# Altium PCB ALCT_MEZ_LX150T.PcbDoc (part 5 of 9)
Units mil, origin at the board's own origin, x right, y up, seen from the top; angles counter-clockwise.
Board outline 4101.98 x 5875.01 mil, 12 copper layers (Top Layer, Mid-Layer 1, +3V3, Mid-Layer 2, +1V2, Mid-Layer 4, +2V5, Mid-Layer 5, GND1, Mid-Layer 7, GND2, Bottom Layer), stack 64.7 mil thick; 378 components, 616 nets, 2492 pads, 1686 vias.
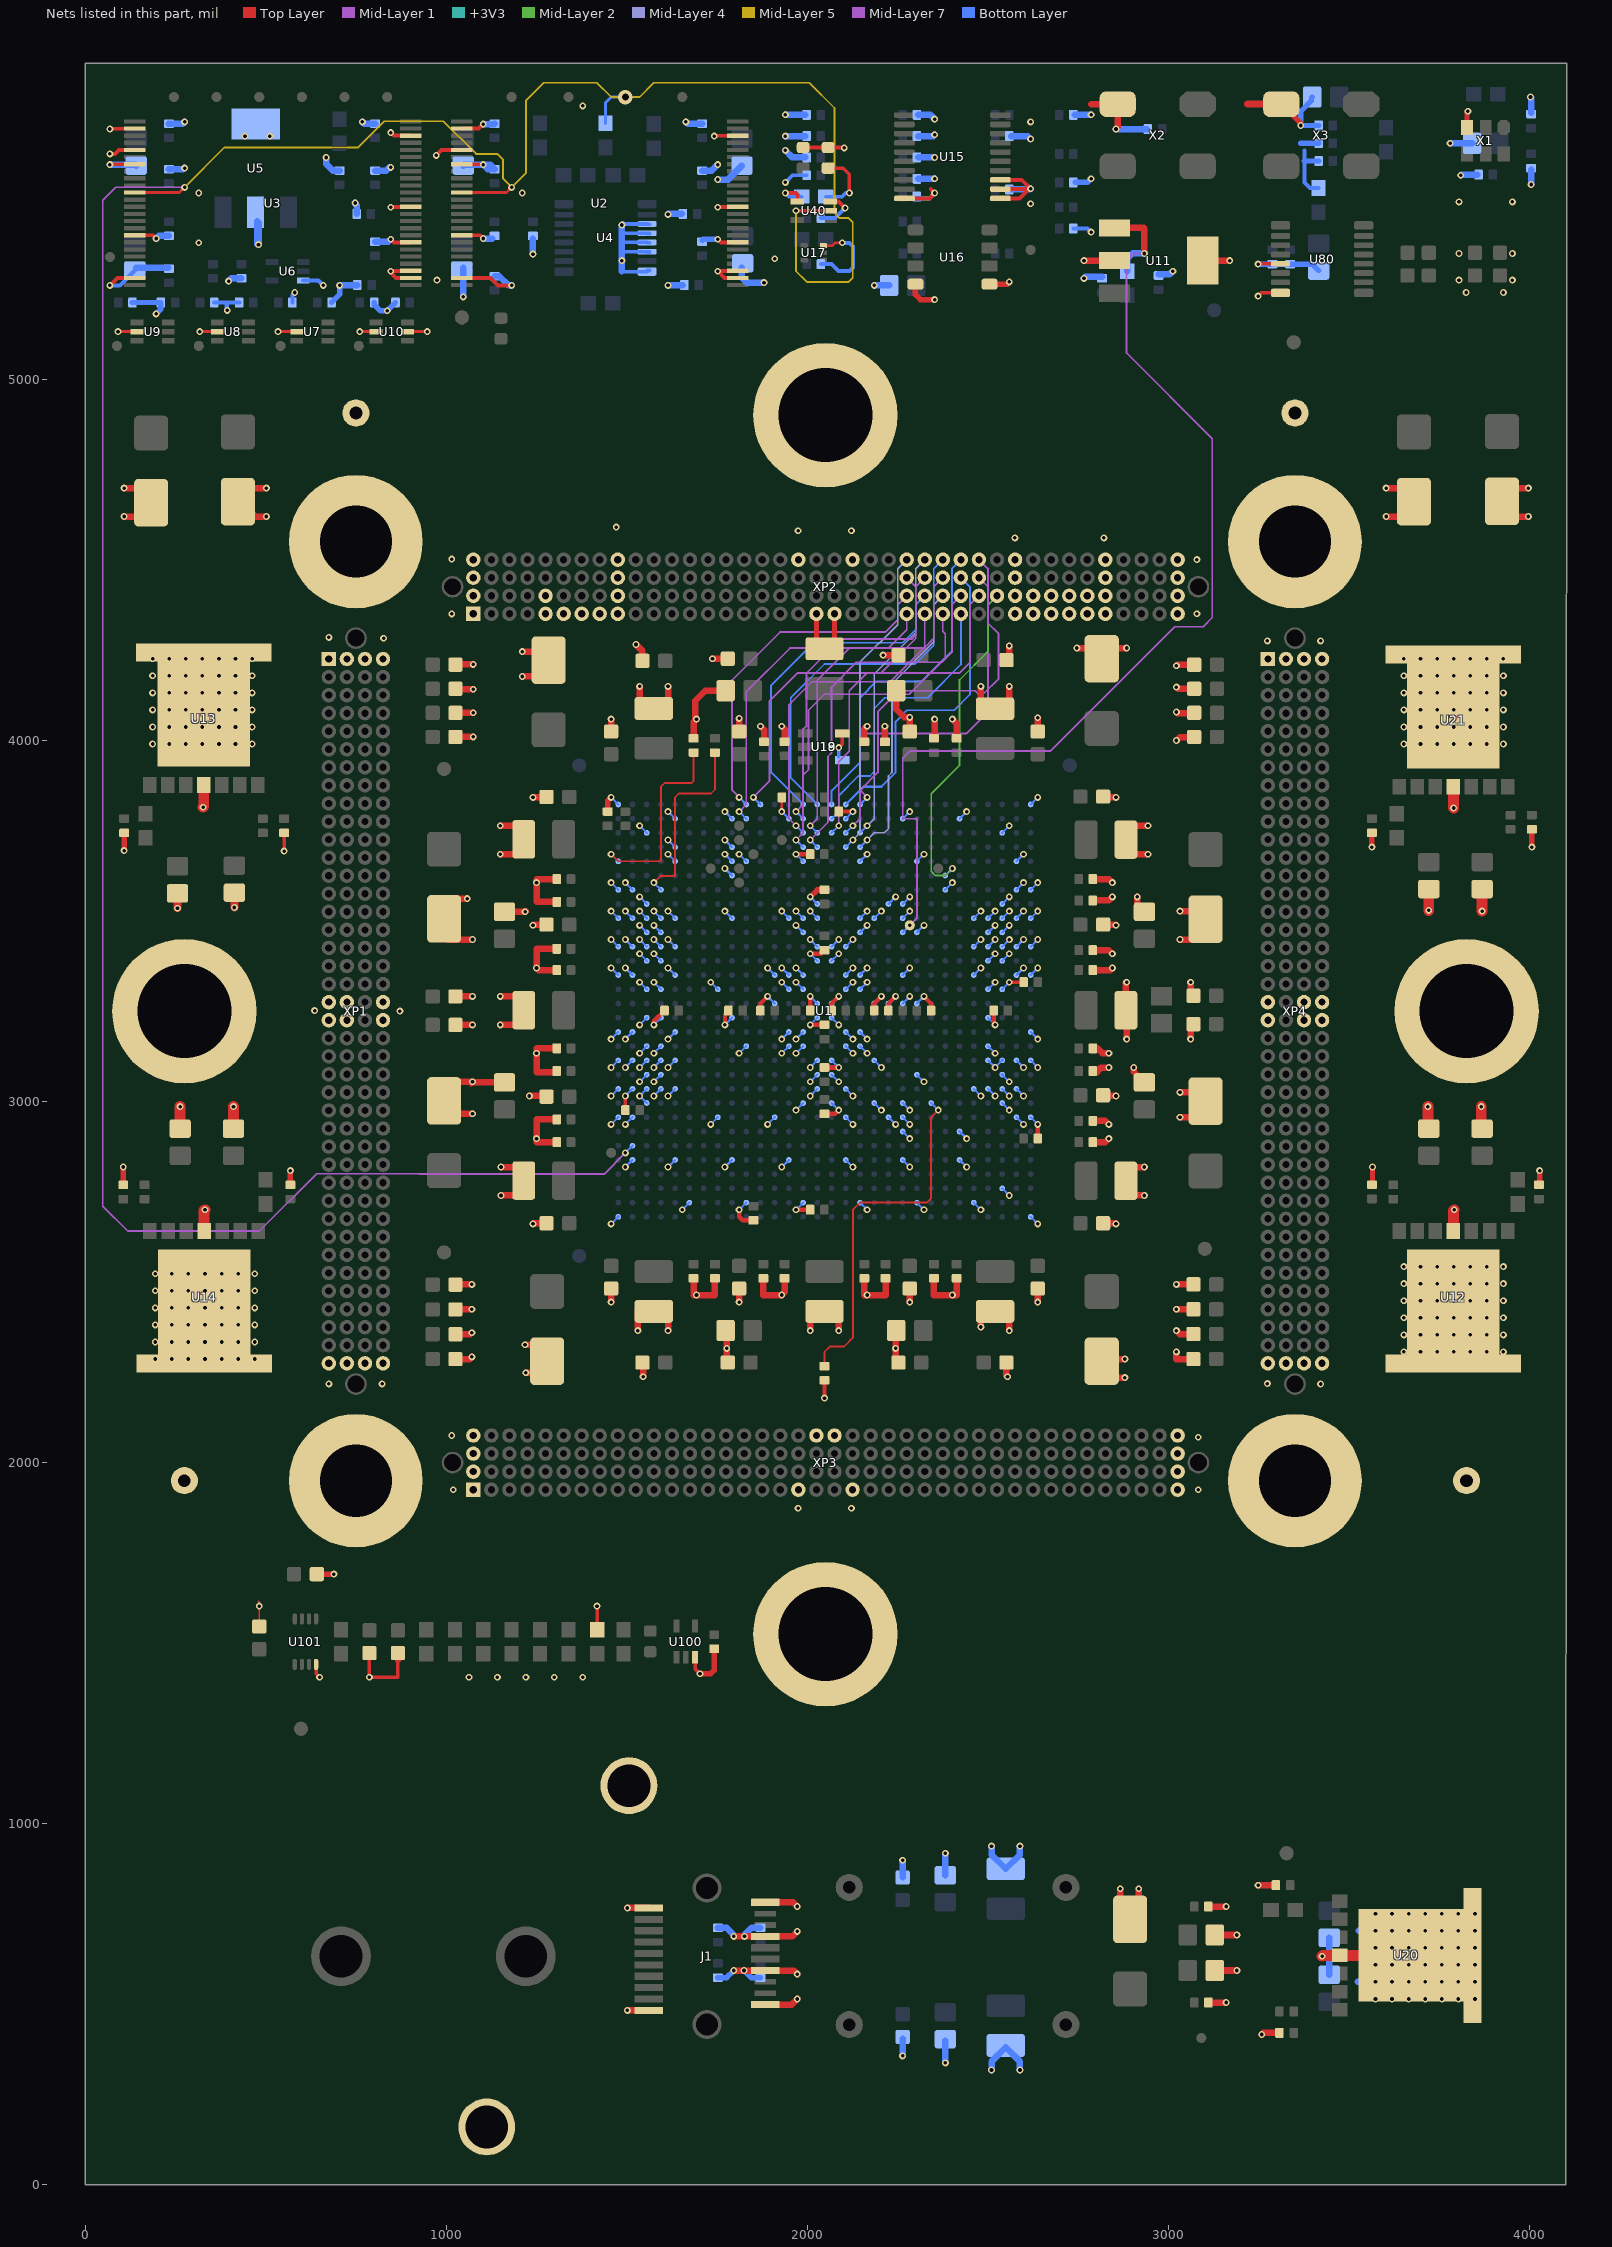
[diagram p14: the nets of this part, all layers, seen from the top]

## Via types
v1: diameter 19, hole 10, Top Layer to Bottom Layer, tented both sides, 1667 vias
v2: diameter 40, hole 20, Top Layer to Bottom Layer, 12 vias
v3: diameter 19, hole 10, Top Layer to Bottom Layer, 7 vias

## Nets (pads, with @x,y where several pads share a name; then routed paths per layer and width w, separated by ;. In a path a pad name is that pad's centre, name@x,y a point inside that pad or via, vN(x,y) a via of type N, cw(c..) or ccw(c..) an arc to the next point about the centre after c; other vN are vias at no path point) (continued)
GND: C1.2 C2.2 C3.2 C4.2 C5.2 C6.2 C7.2 C8.2 C9.2 C10.2 C11.2 C12.2 C13.2 C14.2 C15.2 C16.2 C17.2 C18.2 C19.2 C20.2 C21.2 C22.2 C23.2 C24.2 C25.2 C26.2 C27.2 C28.2 C29.2 C30.2 C31.2 C32.2 C33.2 C40.2 C41.2 C42.2 C43.2 C44.2 C45.2 C46.2 C47.2 C50.2 C51.2 C52.2 C53.2 C54.2 C55.2 C56.2 C57.2 C58.2 C59.2 C60.2 C61.2 C62.2 C63.2 C64.2 C65.2 C66.2 C67.2 C68.2 C69.2 C70.2 C71.2 C72.2 C73.2 C74.2 C75.2 C76.2 C77.2 C78.2 C82.2 C83.2 C84.2 C85.2 C86.2 C87.2 C88.2 C89.2 C90.2 C91.2 C92.2 C93.2 C94.2 C95.2 C96.2 C99.2 C100.2 C101.2 C102.2 C103.2 C104.2 C105.2 C106.2 C107.2 C108.1 C109.2 C110.2 C111.2 C112.2 C113.2 C114.2 C115.2 C116.2 C117.2 C118.2 C119.2 C120.2 C121.2 C122.2 C123.2 C124.2 C125.2 C126.2 C127.2 C128.2 C129.2 C130.2 C131.2 C132.2 C133.2 C134.2 C135.2 C136.2 C137.2 C138.2 C139.2 C140.2 C141.2 C142.2 C143.2 C144.2 C145.2 C146.2 C147.2 C148.2 C201.2 C202.2 C203.2 C204.2 C205.2 C211.2 C212.2 C213.2 C214.2 C215.2 C221.2 C222.2 C223.2 C224.2 C225.2 C231.2 C232.2 C233.2 C234.2 C235.2 C241.2 C242.2 C243.2 C244.2 C251.2 C252.2 C253.2 C254.2 C261.2 C262.2 C263.2 C264.2 C265.2 C266.2 C267.2 C268.2 C271.2 C272.2 C273.2 C274.2 C275.2 C276.2 C301.2 C302.2 C311.2 C312.2 C321.2 C322.2 C331.2 C332.2 C341.2 C342.2 C351.2 C361.2 C362.2 C363.2 C364.2 C365.2 C371.2 C372.2 C373.2 C374.2 C375.2 C401.2 C411.2 C421.2 C431.2 C441.2 C451.2 C461.2 C462.2 C471.2 C472.2 CT1.2 CT2.2 CT3.2 CT4.2 CT5.2 CT6.2 CT7.2 CT8.2 CT9.2 CT10.2 CT11.2 CT12.2 CT13.2 D1.K D41.K H1.1 H2.1 H3.1 H4.1 H12.1 H31.1 H34.1 H42.1 J1.1 J1.10 J1.11 J1.14 J1.17 J1.20 M1.1 M1.2 R3.2 R6.2 R9.2 R12.2 R14.2 R17.2 R22.2 R23.2 R28.2 R48.1 R49.1 R50.2 R52.2 R53.2 R54.2 R57.2 R83.2 R101.1 TPG1.1 TPG2.1 TPG3.1 TPG4.1 U1.A1 U1.A8 U1.A12 U1.A14 U1.A18 U1.A20 U1.A22 U1.A24 U1.A30 U1.AA2 U1.AA13 U1.AA26 U1.AB5 U1.AB15 U1.AB22 U1.AB25 U1.AB26 U1.AB27 U1.AB29 U1.AC8 U1.AC17 U1.AE2 U1.AF5 U1.AF10 U1.AF12 U1.AF14 U1.AF18 U1.AF20 U1.AF22 U1.AF26 U1.AF27 U1.AF29 U1.AG10 U1.AG11 U1.AG12 U1.AG13 U1.AG15 U1.AG17 U1.AG19 U1.AG20 U1.AG21 U1.AG22 U1.AH9 U1.AH10 U1.AH11 U1.AH12 U1.AH13 U1.AH15 U1.AH17 U1.AH19 U1.AH20 U1.AH21 U1.AH22 U1.AH23 U1.AH28 U1.AJ5 U1.AJ8 U1.AJ10 U1.AJ12 U1.AJ14 U1.AJ18 U1.AJ20 U1.AJ22 U1.AJ24 U1.AK1 U1.AK8 U1.AK10 U1.AK12 U1.AK14 U1.AK18 U1.AK20 U1.AK22 U1.AK24 U1.AK30 U1.B8 U1.B10 U1.B12 U1.B18 U1.B20 U1.B22 U1.B24 U1.B26 U1.C3 U1.C9 U1.C10 U1.C11 U1.C12 U1.C17 U1.C19 U1.C20 U1.C21 U1.C22 U1.C23 U1.C28 U1.D10 U1.D12 U1.D13 U1.D15 U1.D17 U1.D19 U1.D20 U1.D21 U1.D22 U1.E2 U1.E10 U1.E18 U1.E20 U1.E22 U1.F5 U1.F7 U1.F29 U1.G24 U1.J2 U1.J11 U1.J16 U1.J21 U1.J26 U1.K5 U1.K7 U1.K8 U1.K9 U1.K16 U1.K18 U1.K22 U1.K23 U1.K29 U1.L8 U1.L16 U1.L23 U1.M9 U1.M12 U1.M16 U1.M22 U1.N2 U1.N13 U1.N14 U1.N17 U1.N18 U1.N21 U1.N22 U1.N26 U1.P5 U1.P8 U1.P10 U1.P13 U1.P14 U1.P17 U1.P18 U1.P20 U1.P29 U1.R9 U1.R11 U1.R12 U1.R15 U1.R16 U1.R19 U1.R20 U1.T10 U1.T11 U1.T12 U1.T15 U1.T16 U1.T19 U1.T20 U1.T22 U1.T23 U1.U2 U1.U9 U1.U13 U1.U14 U1.U17 U1.U18 U1.U21 U1.U22 U1.U26 U1.V5 U1.V13 U1.V14 U1.V17 U1.V18 U1.V22 U1.V29 U1.W8 U1.W16 U1.W18 U2.2 U2.5 U2.7 U2.17 U2.23 U2.26 U2.27 U2.31 U2.36 U2.46 U3.2 U3.5 U3.7 U3.17 U3.23 U3.26 U3.27 U3.31 U3.36 U3.46 U4.3 U4.4 U4.5 U4.6 U4.8 U5.1 U5.4 U6.3 U7.2 U8.2 U9.2 U10.2 U10.5 U11.1 U11.4 U12.4 U12.8 U13.4 U13.8 U14.4 U14.8 U15.10 U15.11 U15.12 U15.13 U16.4 U16.5 U17.3 U18.5 U19.5 U20.4 U20.8 U21.4 U21.8 U40.3 U80.5 U80.8 U100.3 U101.4 X1.3 X2.2 X3.2 XP1.A1 XP1.A20 XP1.A21 XP1.A40 XP1.B1 XP1.B20 XP1.B21 XP1.B40 XP1.C1 XP1.C40 XP1.D1 XP1.D20 XP1.D21 XP1.D40 XP2.A1 XP2.A5 XP2.A6 XP2.A7 XP2.A8 XP2.A9 XP2.A20 XP2.A21 XP2.A31 XP2.A32 XP2.A33 XP2.A34 XP2.A35 XP2.A36 XP2.A40 XP2.B1 XP2.B5 XP2.B9 XP2.B31 XP2.B32 XP2.B33 XP2.B34 XP2.B35 XP2.B36 XP2.B40 XP2.C1 XP2.C9 XP2.C31 XP2.C36 XP2.C40 XP2.D1 XP2.D9 XP2.D19 XP2.D22 XP2.D31 XP2.D36 XP2.D40 XP3.A1 XP3.A19 XP3.A22 XP3.A40 XP3.B1 XP3.B40 XP3.C1 XP3.C40 XP3.D1 XP3.D20 XP3.D21 XP3.D40 XP4.A1 XP4.A20 XP4.A21 XP4.A40 XP4.B1 XP4.B40 XP4.C1 XP4.C20 XP4.C21 XP4.C40 XP4.D1 XP4.D20 XP4.D21 XP4.D40 | length 27376.2
  Top Layer w5: 479.77,1616.2 482.28,1613.69 C117.2@482.28,1546.27
  Top Layer w7: v1@842.52,5298.63 v1@843.7,5299.81 ; U17.3@2044.29,5369.49 2068.9,5369.49 2076.77,5377.37
  Top Layer w8: v1(91.21,5131.3) U9.2@143.7,5131.3 U9.2@146.33,5131.3 ; v1(317.59,5131.3) U8.2@366.14,5131.3 U8.2@372.7,5131.3 ; v1(534.12,5131.3) U7.2@585.96,5131.3 U7.2@589.24,5131.3 ; v1(760.5,5131.3) U10.2@805.77,5131.3 U10.2@815.62,5131.3 ; U10.5@902.23,5131.3 v1(947.51,5131.3) ; v1(1929.15,3802.54) R14.2@1929.13,3841.93 ; 2076.77,5377.37 v1(2096.46,5377.37) ; v1@3826.38,5739.18 v1(3828.74,5741.54)
  Top Layer w10: v1(68.9,5623.43) v1@70.48,5623.43 ; v1(68.9,5692.33) 70.08,5693.51 U3.2@137.8,5693.51 ; v1@70.08,5595.08 U3.7@137.8,5595.08 ; v1(551.18,3693.12) R6.2@551.18,3736.42 ; U101.4@639.76,1441.15 639.76,1415.56 v1(649.61,1405.71) ; C107.2@787.4,1462.64 v1(787.4,1405.56) 866.14,1405.56 866.14,1452.01 C108.1@866.14,1462.64 ; U2.7@1043.31,5595.08 1097.24,5595.08 1098.41,5593.91 v1(1102.36,5593.9) ; R101.1@1418.11,1537.6 v1@1418.11,1602.56 ; C261.2@1496.08,2975.81 v1(1496.08,3015.15) ; U100.3@1688.98,1460.83 1688.98,1429.34 v1(1702.76,1415.56) ; v1(1742.13,5672.64) 1743.31,5673.82 U2.46@1807.09,5673.82 ; D1.K@1988.19,5641.15 D41.K@2057.09,5641.15 2101.03,5641.15 v3(2101.88,5640.3) ; v1(2047.24,2178.55) R54.2@2047.24,2223.82 ; v1(2086.61,3979.73) 2096.46,3989.57 U18.5@2096.46,4019.1 ; v1(2559.06,3330.12) C96.2@2594.49,3330.12 ; CT7.2@2866.14,760.6 2890.47,736.27 CT7.2@2917.32,763.12 ; v1(3248.03,5229.73) 3256.89,5238.59 U80.8@3310.04,5238.59 ; v1(3248.03,5318.31) 3249.02,5319.3 U80.5@3310.04,5319.3
  Top Layer w11: v1(68.9,5259.26) 89.76,5280.12 U3.23@137.8,5280.12 ; v1@70.48,5623.43 83.46,5623.43 94.49,5634.45 U3.5@137.8,5634.45 ; U3.17@137.8,5398.23 187.8,5398.23 v1(196.85,5389.18) ; v1@842.52,5298.63 861.02,5280.12 U3.26@901.57,5280.12 ; v1@843.7,5299.81 U3.27@901.57,5299.81 ; v1(846.46,5387.21) 855.12,5378.55 U3.31@901.57,5378.55 ; v1(846.46,5475.79) 847.64,5476.97 U3.36@901.57,5476.97 ; v1(846.46,5682.49) 855.12,5673.82 U3.46@901.57,5673.82 ; v1(972.44,5619.49) 987.4,5634.45 U2.5@1043.31,5634.45 ; U2.23@1043.31,5280.12 1122.05,5280.12 1142.91,5259.26 v1(1181.1,5259.26) ; U2.17@1043.31,5398.23 1093.31,5398.23 v1(1102.36,5389.18) ; U2.2@1043.31,5693.51 1089.77,5693.51 v1(1102.36,5706.1) ; v1@1748.03,5475.79 1749.21,5476.97 U2.36@1807.09,5476.97 ; v1(1751.97,5387.21) 1760.63,5378.55 U2.31@1807.09,5378.55 ; U2.26@1807.09,5280.12 1807.09,5280.24 1770.36,5280.24 v1(1751.97,5298.63) 1771.65,5298.63 1772.83,5299.81 U2.27@1807.09,5299.81 ; U40.3@2062.99,5491.54 2086.61,5491.54 v1(2104.33,5473.82) ; U15.10@2268.7,5500.4 2337.6,5500.4 v1(2352.36,5515.16) ; 2341.54,5525.99 v1@2346.71,5520.81 ; v1@2346.46,5521.07 v1@2346.71,5520.81 ; U15.11@2534.45,5500.4 2587.6,5500.4 v1@2613.19,5525.99 ; U15.12@2534.45,5525.99 v1@2613.19,5525.99 ; U15.13@2534.45,5551.58 2593.5,5551.58 2616.14,5528.94 v1@2613.19,5525.99 ; v1@2346.71,5520.81 v1(2352.36,5515.16) ; v1@2346.71,5520.81 v1(2352.36,5515.16)
  Top Layer w12: v1(1574.8,3212.01) 1574.8,3221.86 C202.2@1604.33,3251.38 ; v1(1771.66,3212) 1771.66,3241.55 C221.2@1781.5,3251.38 ; v1(1811.03,2700.2) 1811.02,2680.52 1820.87,2670.67 C232.2@1850.39,2670.67 ; C265.2@1870.08,3251.38 1870.08,3271.05 v1(1889.78,3290.75) ; v1(1968.51,2700.2) C242.2@2007.87,2700.2 ; v1(1968.51,3684.45) C211.2@2007.87,3684.45 ; v1(2007.88,3212) C273.2@2047.24,3212.01 ; C272.2@2007.87,3251.38 v1(2007.88,3290.75) ; v1(2007.88,3408.84) 2037.38,3408.84 C263.2@2047.24,3418.71 ; C262.2@2047.24,2965.95 2076.8,2965.95 v1(2086.63,2975.78) ; C271.2@2066.93,3251.38 2066.93,3271.05 v1(2086.63,3290.75) ; C222.2@2086.61,3802.56 v1@2125.96,3802.56 ; C274.2@2185.04,3251.38 2185.04,3271.06 v1(2204.73,3290.75) ; C212.2@2224.41,3251.38 2224.41,3271.07 v1(2244.09,3290.75) ; v1(2322.84,3290.75) 2342.52,3271.08 C267.2@2342.52,3251.38 ; C94.2@2515.75,3251.38 2515.75,3215.95 v1(2519.69,3212) ; C252.2@2637.8,2897.05 v1(2637.79,2936.42)
  Top Layer w14: XP2.A20@2025,4350.01 2025,4275.6 C462.2@2047.24,4253.35 2075,4281.11 XP2.A21@2075,4350.01
  Top Layer w15: R9.2@105.76,2775.01 v1(105.76,2818.31) ; v1(108.27,3694.3) C8.2@108.27,3739.57 ; C13.2@568.36,2773.04 v1(568.36,2808.47) ; C118.2@641.73,1691.15 v1(688.98,1691.15) ; 866.14,1452.01 C108.1@878.74,1464.61 ; C10.2@1025.59,2296.66 C10.2@1029.53,2292.72 ; R57.2@1446.85,3802.56 1446.85,3832.06 v1(1456.71,3841.92) ; v1(1702.76,1415.56) 1732.28,1415.56 1742.13,1425.4 C109.2@1742.13,1484.45 ; v1(2007.88,3566.33) 2027.57,3586.03 C223.2@2047.24,3586.03 ; C264.2@2047.24,3093.9 v1(2086.63,3093.9) ; U16.4@2299.07,5263 2299.07,5233.8 2312.99,5219.89 v1(2352.36,5219.89) ; U16.5@2504.07,5263 2552.95,5263 v1(2559.06,5269.1) ; X3.2@3321.85,5751.38 3366.14,5707.09 v1(3366.14,5702.17) ; v1(3562.99,3704.14) C16.2@3562.99,3739.57 ; R17.2@3564.57,2775.01 v1(3564.57,2818.31) ; X1.3@3826.38,5696.27 v1@3826.38,5739.18 ; v1(4005.91,3704.14) R12.2@4005.91,3747.45 ; C19.2@4027.17,2773.04 v1(4027.17,2808.47)
  Top Layer w18: v1(108.27,4619.49) 143.7,4619.49 185.04,4660.83 147.64,4698.23 v1(108.27,4698.23) ; v1(501.97,4619.49) 471.26,4619.49 429.13,4661.62 465.75,4698.23 v1(501.97,4698.23) ; C10.2@1023.62,2291.93 C10.2@1024.41,2292.72 ; C125.2@1023.62,2425.79 1024.8,2424.61 C125.2@1025.59,2424.61 ; C122.2@1023.62,2492.72 1024.41,2493.51 v1(1070.87,2493.51) ; C10.2@1025.59,2286.82 1064.96,2286.82 v1(1070.87,2292.72) ; C129.2@1025.59,2355.45 1066.67,2355.45 v1(1070.87,2359.65) ; C125.2@1025.59,2424.09 1070.34,2424.09 v1(1070.87,2424.61) ; C124.2@1031.5,3212.8 1032.28,3212.01 v1(1072.83,3212.01) ; C121.2@1031.5,3283.67 1038.58,3290.75 v1(1072.83,3290.75) ; C139.2@1031.5,4008.47 1032.28,4009.26 v1(1074.8,4009.26) ; C143.2@1031.5,4075.4 1032.28,4076.19 v1(1074.8,4076.19) ; C123.2@1031.5,4142.33 1032.68,4141.15 v1(1074.8,4141.15) ; C142.2@1031.5,4209.26 1032.28,4210.05 v1(1074.8,4210.05) ; v1(1058.07,3561.42) 994.09,3561.42 CT5.2@994.09,3505.32 994.09,3458.08 1003.94,3448.23 v1(1072.83,3448.23) ; v1@1069.3,3051 1070.87,3052.56 C312.2@1161.42,3052.56 ; v1(1072.83,2965.95) 1029.53,2965.95 CT3.2@994.09,3001.38 994.09,3054.53 v1(1072.83,3054.53) ; v1(1149.61,3212.01) 1214.57,3212.01 C421.2@1214.57,3252.56 1214.57,3290.75 v1(1149.61,3290.75) ; v1(1149.61,3684.45) 1212.6,3684.45 1212.6,3763.19 v1(1149.61,3763.19) ; v1(1151.57,2739.57) 1212.6,2739.57 C461.2@1212.6,2780.91 ; v1(1151.57,2818.31) 1212.6,2818.31 C461.2@1212.6,2780.91 ; C302.2@1161.42,3525.01 v1(1218.5,3525.01) v1@1220.47,3526.97 ; v1(1210.63,4176.58) 1238.19,4176.58 1281.1,4219.49 CT11.2@1283.46,4221.86 1250,4255.32 1240.16,4245.48 v1(1210.63,4245.48) ; C461.2@1213.19,2781.5 C461.2@1212.6,2780.91 ; C471.2@1213.19,3726.38 1214.57,3725.01 C471.2@1213.98,3724.41 ; v1@1218.5,2326.19 1245.28,2326.19 1283.46,2288 1244.27,2248.8 v1(1220.47,2248.8) ; v1(1230.32,3015.16) 1272.83,3015.16 C362.2@1275.59,3012.41 ; v1(1240.16,2660.83) 1241.34,2662.01 C363.2@1279.53,2662.01 ; v1(1240.16,3487.6) 1241.34,3488.79 C374.2@1279.53,3488.79 ; v1(1240.16,3841.93) 1276.38,3841.93 C373.2@1277.56,3843.12 ; C266.2@1306.12,2887.21 1250,2887.21 v1(1250,2897.05) 1250,2950.2 C234.2@1306.12,2950.2 ; C225.2@1306.12,3080.12 1250,3080.12 v1(1250,3133.27) 1250,3147.05 C201.2@1306.12,3147.05 ; C275.2@1306.12,3363.59 1255.91,3363.59 v1(1250,3369.49) 1250,3422.64 C276.2@1306.12,3422.64 ; C243.2@1306.12,3552.56 1250,3552.56 v1(1250,3605.71) 1250,3615.56 C213.2@1306.12,3615.56 ; v1(1456.69,2444.3) C331.2@1456.69,2483.88 ; C311.2@1456.69,4024.22 v1(1456.69,4058.47) ; v1(1501.57,483.47) J1.10@1560.63,483.47 ; v1(1501.57,766.93) J1.1@1560.63,766.93 ; v1(1525.59,4265.16) 1543.31,4247.45 C2.2@1543.31,4219.89 C2.2@1535.43,4227.76 ; v1(1530.51,2365.56) 1530.51,2418.71 C431.2@1574.8,2418.71 1614.17,2418.71 v1(1614.17,2365.56) ; v1(1535.43,4149.02) 1535.43,4088 C411.2@1574.8,4088 1614.17,4088 v1(1614.17,4149.02) ; C126.2@1543.31,2276.97 1545.28,2276.97 v1(1545.28,2237.6) ; C233.2@1685.04,2510.26 1685.04,2463.98 v1(1692.91,2463.98) 1744.09,2463.98 C268.2@1744.09,2510.26 ; R50.2@1685.04,4011.23 1685.04,4050.6 v1(1692.91,4058.47) ; v1@1689.38,4062.01 1689.38,4109.07 1717.52,4137.21 C365.2@1773.62,4137.21 ; v1(1737.2,4225.79) C120.2@1779.53,4225.79 ; C322.2@1773.62,2365.56 1776.57,2362.6 v1(1776.57,2316.34) 1776.57,2279.93 C127.2@1779.53,2276.97 ; v1(1796.26,593.71) v1(1824.41,593.71) J1.14@1883.46,593.71 1962.2,593.71 v1(1972.05,583.86) ; v1(1796.26,688.19) J1.17@1883.46,688.19 1958.27,688.19 v1(1972.05,701.97) ; v1(1811.02,2444.3) C361.2@1811.02,2481.76 C361.2@1811.02,2483.88 ; C321.2@1811.02,4024.22 v1(1811.02,4060.44) ; v1(1870.08,4038.79) 1879.92,4028.94 C205.2@1879.92,3995.72 ; C224.2@1877.95,2510.26 1877.95,2463.98 v1(1929.13,2463.98) 1937.01,2471.86 C231.2@1937.01,2510.26 ; J1.11@1883.46,499.22 1956.3,499.22 v1(1972.05,514.97) ; J1.20@1883.46,782.68 1960.24,782.68 v1(1972.05,770.87) ; v1(1929.13,4038.79) 1936.84,4031.08 C30.2@1936.84,3995.93 ; v1(2007.87,2365.56) 2007.87,2417.92 2086.61,2417.92 v1(2086.61,2365.56) ; C203.2@2157.48,2510.26 2157.48,2463.98 v1(2165.35,2463.98) 2216.54,2463.98 C204.2@2216.54,2510.26 ; C251.2@2157.48,3995.72 2157.48,4030.91 v1(2165.35,4038.79) ; v1(2209.65,4235.64) C140.2@2251.97,4235.64 C140.2@2253.94,4235.64 ; C215.2@2214.57,3995.72 v1(2214.57,4038.79) ; C332.2@2246.06,2365.56 2244.09,2363.59 v1(2244.09,2316.34) 2244.09,2284.85 C135.2@2251.97,2276.97 ; C375.2@2246.06,4137.21 2246.06,4086.03 2268.7,4063.39 v1(2283.46,4063.39) C371.2@2283.46,4024.22 ; v1(2283.46,2444.3) C372.2@2283.46,2481.76 C372.2@2283.46,2483.88 ; C254.2@2350.39,2510.26 2350.39,2463.98 v1(2401.57,2463.98) 2413.39,2463.98 C241.2@2413.39,2510.26 ; R52.2@2350.39,4011.23 2352.36,4013.19 v1(2352.36,4058.47) ; v1(2401.57,4058.47) 2413.39,4046.66 R53.2@2413.39,4011.23 ; v1(2480.32,2375.4) 2480.32,2417.92 2559.06,2417.92 v1(2559.06,2365.56) ; v1(2480.31,4149.02) 2480.31,4090.18 2559.06,4090.18 v1(2559.06,4149.02) ; C128.2@2551.18,2276.97 2551.18,2240.56 v1(2554.13,2237.6) ; C1.2@2551.18,4221.86 2559.06,4229.73 v1(2559.06,4261.23) ; v1(2637.8,2444.3) C341.2@2637.8,2483.88 ; C351.2@2637.8,4024.22 v1(2637.8,4062.41) ; v1(2746.06,4255.32) 2785.43,4255.32 CT4.2@2814.96,4225.79 2844.49,4255.32 v1(2883.86,4255.32) ; v1(2765.75,5328.16) U11.4@2850.39,5328.16 ; 2785.43,5761.23 X2.2@2859.25,5761.23 2859.25,5697.25 v1(2854.33,5692.33) ; C235.2@2790.34,2887.21 2824.8,2887.21 v1(2834.65,2897.05) ; C253.2@2790.34,2946.27 2824.8,2946.27 v1(2834.65,2936.42) ; C92.2@2790.34,3363.59 2838.58,3363.59 v1(2844.49,3369.49) ; C93.2@2790.34,3418.71 2834.65,3418.71 v1(2844.49,3408.86) ; C244.2@2790.34,3556.5 2834.65,3556.5 v1(2844.49,3566.34) ; C214.2@2790.34,3615.56 2834.65,3615.56 v1(2844.49,3605.71) ; C91.2@2799.21,3147.05 2803.15,3147.05 2816.93,3133.27 v1(2834.65,3133.27) ; 2803.15,3080.12 2799.21,3080.12 2812.99,3093.9 v1(2834.65,3093.9) ; CT10.2@2814.96,2280.91 2860.73,2235.14 v1(2878.94,2235.14) ; C301.2@2815.93,2662.01 2853.15,2662.01 v1(2854.33,2660.83) ; C88.2@2815.93,3016.34 2853.15,3016.34 v1(2854.33,3015.16) ; C89.2@2815.93,3488.79 2853.15,3488.79 v1(2854.33,3487.6) ; C364.2@2815.93,3843.12 2817.11,3841.93 v1(2854.33,3841.93) ; CT10.2@2829.53,2286.82 v1(2878.94,2286.82) ; CT7.2@2866.14,760.6 v1(2866.14,820.08) ; v1(2883.86,3172.64) 2883.86,3250.6 C87.2@2881.89,3252.56 2881.89,3328.16 v1(2883.86,3330.12) ; v1(2903.54,3093.9) 2903.54,3082.09 C342.2@2933.07,3052.56 ; v1(2913.39,3566.34) 2913.39,3544.69 C90.2@2933.07,3525.01 ; CT7.2@2917.32,763.12 v1(2917.32,820.08) ; v1(2933.07,2739.57) 2881.89,2739.57 C401.2@2881.89,2780.12 2881.89,2818.31 v1(2933.07,2818.31) ; v1(2942.91,3684.45) 2881.89,3684.45 C86.2@2881.89,3725.01 2881.89,3763.19 v1(2942.91,3763.19) ; v1(3021.65,3999.41) 3030.71,4008.47 C141.2@3070.87,4008.47 ; v1(3021.65,2306.5) 3021.65,2286.82 C9.2@3068.9,2286.82 ; v1(3021.65,2365.56) 3031.5,2355.71 C131.2@3068.9,2355.71 ; v1(3021.65,2424.61) C138.2@3068.9,2424.61 ; v1(3021.65,2493.51) C130.2@3068.9,2493.51 ; v1(3021.65,4078.16) 3024.41,4075.4 C132.2@3070.87,4075.4 ; v1(3021.65,4147.05) 3026.38,4142.33 C136.2@3070.87,4142.33 ; v1(3021.65,4206.11) 3024.8,4209.26 C144.2@3070.87,4209.26 ; v1(3031.5,2956.11) 3057.87,2956.11 CT6.2@3102.36,3000.6 3077.95,3025.01 v1(3031.5,3025.01) ; v1(3031.5,3448.23) 3102.36,3448.23 CT13.2@3102.36,3504.53 3079.92,3526.97 v1(3031.5,3526.97) ; v1(3061.02,3172.64) 3061.02,3206.11 C137.2@3068.9,3213.98 ; v1(3061.02,3330.12) 3061.02,3300.6 C134.2@3068.9,3292.72 ; U11.1@3094.49,5328.16 v1(3169.29,5328.16) ; C111.2@3114.17,505.12 v1(3159.45,505.12) ; C101.2@3114.17,770.87 v1(3159.45,770.87) ; v1(3248.03,829.93) C5.2@3297.24,829.93 ; v1(3257.87,416.54) 3262.6,421.27 R3.2@3301.18,421.27 ; v1(3602.36,4619.49) 3638.98,4619.49 3677.17,4657.68 3636.61,4698.23 v1(3602.36,4698.23) ; v1(3996.06,4619.49) 3958.66,4619.49 3917.32,4660.83 3954.72,4698.23 v1(3996.06,4698.23)
  Top Layer w19: C110.2@3127.95,593.71 v1(3188.98,593.71) ; C100.2@3127.95,692.13 v1(3188.98,692.13)
  Top Layer w19.68: 3218.5,5761.23 X3.2@3312.01,5761.23
  Top Layer w22: v1(255.91,3534.85) C6.2@255.91,3576.19 ; v1(413.39,3536.82) C7.2@413.39,3578.16
  Top Layer w30: C12.2@263.24,2924.61 v1(263.24,2985.64) ; v1(326.77,3814.38) 328.74,3816.34 U13.4@328.74,3876.19 ; U14.4@329.77,2641.15 329.77,2697.84 v1(332.14,2700.2) ; C11.2@410.88,2924.61 v1(410.88,2985.64) ; v1(3425.2,633.08) 3427.56,635.44 U20.4@3474.41,635.44 ; U20.8@3572.83,635.44 U20.4@3474.41,635.44 ; U20.8@3618.77,635.44 U20.4@3474.41,635.44 ; U20.8@3664.7,635.44 U20.4@3474.41,635.44 ; U20.8@3711.81,635.44 U20.4@3474.41,635.44 ; C18.2@3717.96,2924.61 v1(3717.96,2985.64) ; v1(3720.47,3528.94) C14.2@3720.47,3588 C14.2@3720.47,3589.97 ; U12.4@3788.58,2641.15 3788.58,2697.84 v1(3790.95,2700.2) ; U21.4@3788.58,3871.46 3788.58,3813.19 v1(3789.37,3812.41) ; C17.2@3865.6,2924.61 v1(3865.6,2985.64) ; v1(3868.11,3526.97) C15.2@3868.11,3588
  +3V3 w10: v3(2101.88,5640.3) v3@2103.58,5640.3
  Bottom Layer w5: U19.5@2086.61,3955.12 U19.5@2087.97,3953.77
  Bottom Layer w6: v1(1456.71,2660.83) U1.AK1@1476.38,2680.52 ; v1(1456.71,2936.42) U1.AK8@1476.38,2956.11 ; v1(1456.71,3015.15) U1.AK10@1476.38,3034.85 ; v1(1456.71,3093.9) U1.AK12@1476.38,3113.59 ; v1(1456.71,3172.63) U1.AK14@1476.39,3192.32 ; v1(1456.71,3369.48) U1.AK18@1476.38,3349.81 ; v1(1456.72,3448.19) U1.AK20@1476.39,3428.52 ; v1(1456.69,3526.97) U1.AK22@1476.38,3507.29 ; v1(1456.71,3605.7) U1.AK24@1476.38,3586.03 ; v1(1456.71,3841.92) U1.AK30@1476.38,3822.25 ; v1(1496.08,2818.3) U1.AJ5@1515.75,2838 ; v1(1496.08,2936.42) U1.AJ8@1515.75,2956.11 ; v1(1496.08,3015.15) U1.AJ10@1515.75,3034.85 ; v1(1496.08,3093.9) U1.AJ12@1515.75,3113.59 ; v1(1496.1,3172.63) U1.AJ14@1515.76,3192.32 ; v1@1496.07,3369.49 U1.AJ18@1515.75,3349.81 ; v1(1496.08,3448.19) U1.AJ20@1515.76,3428.52 ; v1(1496.08,3526.97) U1.AJ22@1515.75,3507.29 ; v1(1496.08,3605.7) U1.AJ24@1515.75,3586.03 ; v1(1535.44,3054.53) U1.AH11@1555.12,3074.22 ; v1(1535.46,3093.89) U1.AH12@1555.12,3113.59 ; v1(1535.44,3133.27) U1.AH13@1555.12,3152.96 ; v1(1535.44,3212) U1.AH15@1555.12,3231.7 ; v1(1535.44,3330.12) U1.AH17@1555.12,3310.44 ; v1(1535.43,3448.23) U1.AH20@1555.12,3428.55 ; v1(1535.44,3487.6) U1.AH21@1555.12,3467.92 ; v1(1535.44,3526.97) U1.AH22@1555.12,3507.29 ; v1(1535.44,3566.33) U1.AH23@1555.12,3546.66 ; v1(1535.46,3093.89) U1.AH12@1555.12,3113.59 ; v1(1535.45,3408.84) U1.AH19@1555.12,3389.18 ; v1(1535.45,3763.19) U1.AH28@1555.12,3743.51 ; U1.AH9@1555.12,2995.48 v1(1535.45,3015.15) U1.AH10@1555.12,3034.85 ; v1(1574.82,3015.15) U1.AG10@1594.49,3034.85 ; v1(1574.81,3054.53) U1.AG11@1594.49,3074.22 ; v1(1574.82,3093.89) U1.AG12@1594.49,3113.59 ; v1(1574.81,3133.27) U1.AG13@1594.49,3152.96 ; v1(1574.8,3212.01) U1.AG15@1594.49,3231.7 ; v1(1574.81,3330.12) U1.AG17@1594.49,3310.44 ; v1(1574.82,3408.84) U1.AG19@1594.49,3389.18 ; v1@1574.8,3448.21 U1.AG20@1594.49,3428.52 ; v1(1574.81,3487.6) U1.AG21@1594.49,3467.92 ; v1(1574.8,3526.97) U1.AG22@1594.49,3507.29 ; v1(1614.18,2818.3) U1.AF5@1633.86,2838 ; v1(1614.18,3015.15) U1.AF10@1633.86,3034.85 ; v1(1614.18,3093.9) U1.AF12@1633.86,3113.59 ; v1(1614.18,3172.63) U1.AF14@1633.86,3192.32 ; v1(1614.18,3369.48) U1.AF18@1633.86,3349.81 ; v1(1614.18,3448.19) U1.AF20@1633.86,3428.52 ; v1(1614.18,3526.97) U1.AF22@1633.86,3507.29 ; v1(1614.18,3684.45) U1.AF26@1633.86,3664.77 ; v1(1614.18,3723.82) U1.AF27@1633.86,3704.14 ; v1(1614.18,3802.54) U1.AF29@1633.86,3782.88 ; v1(1653.56,2700.2) U1.AE2@1673.23,2719.89 ; v1(1732.29,2936.42) U1.AC8@1751.98,2956.1 ; v1(1732.29,3330.12) U1.AC17@1751.98,3310.43 ; v1(1771.66,2818.3) U1.AB5@1791.34,2838 ; v1(1771.66,3212) U1.AB15@1791.34,3231.7 ; v1(1771.66,3526.97) U1.AB22@1791.34,3507.29 ; v1(1771.66,3645.07) U1.AB25@1791.34,3625.4 ; v1(1771.66,3684.45) U1.AB26@1791.34,3664.77 ; v1(1771.66,3723.82) U1.AB27@1791.34,3704.14 ; v1(1771.67,3802.54) U1.AB29@1791.34,3782.88 ; v1(1811.03,2700.2) U1.AA2@1830.71,2719.89 ; v1(1811.03,3133.27) U1.AA13@1830.71,3152.96 ; v1(1811.03,3684.45) U1.AA26@1830.71,3664.77 ; v1(1889.78,2936.42) U1.W8@1909.45,2956.11 ; v1(1889.78,3290.75) U1.W16@1909.45,3271.07 ; v1(1889.78,3369.48) U1.W18@1909.45,3349.81 ; v1(1929.14,2818.3) U1.V5@1948.82,2838 ; v1(1929.14,3133.27) U1.V13@1948.82,3152.96 ; v1(1929.14,3172.63) U1.V14@1948.83,3192.32 ; v1(1929.14,3330.12) U1.V17@1948.82,3310.44 ; v1(1929.14,3369.48) U1.V18@1948.82,3349.81 ; v1(1929.14,3526.97) U1.V22@1948.82,3507.29 ; v1(1929.15,3802.54) U1.V29@1948.82,3782.88 ; v1(1968.51,2700.2) U1.U2@1988.19,2719.89 ; v1(1968.51,2975.78) U1.U9@1988.19,2995.48 ; v1(1968.51,3133.27) U1.U13@1988.19,3152.96 ; v1(1968.51,3172.63) U1.U14@1988.19,3192.32 ; v1(1968.51,3330.12) U1.U17@1988.19,3310.44 ; v1(1968.51,3369.48) U1.U18@1988.19,3349.81 ; v1(1968.51,3487.6) U1.U21@1988.19,3467.92 ; v1(1968.51,3526.97) U1.U22@1988.19,3507.29 ; v1(1968.51,3684.45) U1.U26@1988.19,3664.77 ; v1(2007.88,3015.15) U1.T10@2027.56,3034.85 ; v1(2007.88,3054.53) U1.T11@2027.56,3074.22 ; v1(2007.88,3093.9) U1.T12@2027.56,3113.59 ; v1(2007.88,3212) U1.T15@2027.56,3231.7 ; v1(2007.88,3290.75) U1.T16@2027.56,3271.07 ; v1(2007.88,3408.84) U1.T19@2027.56,3389.18 ; v1(2007.88,3448.19) U1.T20@2027.56,3428.52 ; v1(2007.88,3526.97) U1.T22@2027.56,3507.29 ; v1(2007.88,3566.33) U1.T23@2027.56,3546.66 ; U1.R9@2066.93,2995.48 v1(2086.63,2975.78) ; U1.R11@2066.93,3074.22 v1(2086.63,3054.53) ; U1.R12@2066.93,3113.59 v1(2086.63,3093.9) ; U1.R15@2066.93,3231.7 v1(2086.63,3212) ; U1.R16@2066.93,3271.07 v1(2086.63,3290.75) ; U1.R19@2066.93,3389.18 v1(2086.62,3408.84) ; U1.R20@2066.94,3428.52 v1(2086.62,3448.19) ; U1.P5@2106.3,2838 v1(2125.99,2818.3) ; U1.P8@2106.3,2956.11 v1(2125.99,2936.42) ; U1.P10@2106.3,3034.85 v1(2125.99,3015.15) ; U1.P13@2106.3,3152.96 v1(2125.99,3133.27) ; U1.P14@2106.31,3192.32 v1(2125.99,3172.63) ; U1.P17@2106.3,3310.44 v1(2125.99,3330.12) ; U1.P18@2106.3,3349.81 v1(2125.99,3369.48) ; U1.P20@2106.31,3428.52 v1(2125.99,3448.19) ; U1.P29@2106.3,3782.88 v1(2125.99,3802.54) ; U1.N2@2145.68,2719.88 v1(2165.36,2700.2) ; U1.N13@2145.68,3152.95 v1(2165.36,3133.27) ; U1.N14@2145.68,3192.32 v1(2165.36,3172.63) ; U1.N17@2145.68,3310.43 v1(2165.36,3330.12) ; U1.N18@2145.68,3349.8 v1(2165.36,3369.48) ; U1.N21@2145.68,3467.92 v1(2165.36,3487.6) ; U1.N22@2145.68,3507.28 v1(2165.36,3526.97) ; U1.N26@2145.68,3664.77 v1(2165.36,3684.45) ; U1.M9@2185.04,2995.48 v1(2204.73,2975.78) ; U1.M12@2185.04,3113.59 v1(2204.73,3093.9) ; U1.M16@2185.04,3271.07 v1(2204.73,3290.75) ; U1.M22@2185.04,3507.29 v1(2204.73,3526.97) ; U1.L8@2224.41,2956.11 v1(2244.09,2936.42) ; U1.L16@2224.41,3271.07 v1(2244.09,3290.75) ; U1.L23@2224.41,3546.66 v1(2244.09,3566.33) ; U1.K5@2263.78,2838 v1(2283.48,2818.3) ; U1.K7@2263.78,2916.74 v1(2283.48,2897.05) ; U1.K8@2263.78,2956.11 v1(2283.48,2936.42) ; U1.K9@2263.78,2995.48 v1(2283.48,2975.78) ; U1.K16@2263.78,3271.07 v1(2283.48,3290.75) ; U1.K18@2263.78,3349.81 v1(2283.48,3369.48) ; U1.K22@2263.78,3507.29 v1(2283.48,3526.97) ; U1.K23@2263.78,3546.66 v1(2283.48,3566.33) ; U1.K29@2263.78,3782.88 v1(2283.47,3802.54) ; U1.J2@2303.15,2719.89 v1(2322.84,2700.2) ; U1.J11@2303.15,3074.22 v1(2322.84,3054.53) ; U1.J16@2303.15,3271.07 v1(2322.84,3290.75) ; U1.J21@2303.15,3467.92 v1(2322.84,3487.6) ; U1.J26@2303.15,3664.77 v1(2322.84,3684.45) ; U1.G24@2381.89,3586.02 v1(2401.58,3605.7) ; U1.F5@2421.26,2838 v1(2440.94,2818.3) ; U1.F29@2421.26,3782.88 v1(2440.94,3802.54) ; U1.E2@2460.63,2719.89 v1(2480.33,2700.2) ; U1.E10@2460.63,3034.85 v1(2480.33,3015.15) ; U1.E18@2460.63,3349.81 v1(2480.33,3369.48) ; U1.E20@2460.64,3428.52 v1(2480.32,3448.19) ; U1.E22@2460.63,3507.29 v1(2480.33,3526.97) ; U1.D10@2500,3034.85 v1(2519.68,3015.16) ; U1.D12@2500,3113.59 v1(2519.7,3093.89) ; U1.D13@2500,3152.96 v1(2519.69,3133.27) ; U1.D15@2500,3231.7 v1(2519.69,3212) ; U1.D17@2500,3310.44 v1(2519.69,3330.12) ; U1.D19@2500,3389.18 v1(2519.69,3408.84) ; U1.D20@2500.01,3428.52 v1(2519.7,3448.22) ; U1.D21@2500,3467.92 v1(2519.69,3487.6) ; U1.D22@2500,3507.29 v1(2519.7,3526.96) ; v1@2519.7,3098.89 2524.67,3098.89 U1.C12@2539.37,3113.59 ; U1.C3@2539.38,2759.25 v1(2559.06,2739.57) ; U1.C9@2539.38,2995.47 v1(2559.06,2975.78) ; U1.C10@2539.37,3034.85 v1(2559.06,3015.16) ; U1.C11@2539.37,3074.22 v1(2559.06,3054.53) ; U1.C17@2539.38,3310.43 v1(2559.06,3330.12) ; U1.C19@2539.38,3389.17 v1(2559.05,3408.84) ; U1.C20@2539.38,3428.52 v1(2559.07,3448.18) ; U1.C21@2539.38,3467.92 v1(2559.06,3487.6) ; U1.C22@2539.38,3507.28 v1(2559.07,3526.96) ; U1.C23@2539.38,3546.65 v1(2559.06,3566.33) ; U1.C28@2539.38,3743.52 v1(2559.05,3763.19) ; U1.B8@2578.74,2956.11 v1(2598.43,2936.42) ; U1.B10@2578.74,3034.85 v1(2598.43,3015.16) ; U1.B12@2578.74,3113.59 v1(2598.43,3093.9) ; U1.B18@2578.74,3349.81 v1(2598.43,3369.48) ; U1.B20@2578.74,3428.52 v1(2598.42,3448.19) ; U1.B22@2578.74,3507.29 v1(2598.43,3526.97) ; U1.B24@2578.74,3586.02 v1(2598.43,3605.7) ; U1.B26@2578.74,3664.77 v1(2598.43,3684.45) ; U1.A1@2618.11,2680.52 v1(2637.79,2660.83) ; U1.A8@2618.11,2956.11 v1(2637.79,2936.42) ; U1.A12@2618.11,3113.59 v1(2637.79,3093.9) ; U1.A14@2618.11,3192.32 v1(2637.79,3172.63) ; U1.A18@2618.11,3349.81 v1(2637.79,3369.48) ; U1.A20@2618.11,3428.52 v1(2637.79,3448.19) ; U1.A22@2618.11,3507.29 v1(2637.8,3526.97) ; U1.A24@2618.11,3586.02 v1(2637.79,3605.7) ; U1.A30@2618.11,3822.25 v1(2637.79,3841.92)
  Bottom Layer w8: U1.F7@2421.26,2916.74 v1(2440.94,2897.05)
  Bottom Layer w10: v1@478.94,5370.87 v1@482.28,5367.53 ; 1487.21,5297.64 U4.8@1556.1,5297.64 ; 1489.17,5378.35 U4.5@1556.1,5378.35 ; 1489.17,5403.94 U4.4@1556.1,5403.94 ; v1@1489.17,5429.53 U4.3@1556.1,5429.53 ; 1491.14,5352.76 U4.6@1556.1,5352.76 ; U4.8@1556.1,5300.6 U4.8@1562.99,5300.6 ; U4.6@1556.1,5351.78 U4.6@1562.99,5351.78 ; U4.5@1556.1,5377.38 U4.5@1562.99,5377.38 ; U4.4@1556.1,5402.96 U4.4@1562.99,5402.96 ; U4.3@1556.1,5428.56 U4.3@1562.99,5428.56 ; U19.5@2086.61,3955.12 v1(2086.61,3979.73)
  Bottom Layer w11: v1(1938.98,5544.69) 1958.66,5564.38 C27.2@1998.03,5564.38 ; C75.2@2037.4,5318.31 2066.93,5318.31 2086.61,5298.63 2116.14,5298.63 2125.98,5308.47 2125.98,5367.53 2116.14,5377.37 v1(2096.46,5377.37) ; C78.2@2037.4,5446.27 2076.77,5446.27 v1(2104.33,5473.82) v1@2106.3,5475.79 ; C33.2@2303.15,5500.4 2337.6,5500.4 v1(2352.36,5515.16) ; R28.2@2736.22,5416.74 2775.59,5416.74 v1(2785.43,5406.9) ; 3375.98,5633.27 3375.98,5603.75 3375.98,5544.69 3391.73,5528.94 R83.2@3415.35,5528.94
  Bottom Layer w12: v1(68.9,5259.26) 96.46,5259.26 C71.2@137.8,5300.6 ; C42.2@357.61,5212.01 392.06,5212.01 ; v1(393.7,5190.36) 392.06,5192 392.06,5212.01 ; C43.2@426.51,5212.01 392.06,5212.01 ; C44.2@574.15,5212.01 574.15,5233.01 v1(580.71,5239.57) ; U6.3@604.33,5273.04 645.67,5273.04 v1(659.45,5259.26)
  Bottom Layer w15: C40.2@131.23,5212.01 C41.2@209.97,5212.01 209.97,5193.64 v1(196.85,5180.52) ; C45.2@682.41,5212.01 704.72,5234.32 v1(704.72,5259.26) ; C46.2@800.52,5212.01 800.52,5206.76 818.24,5189.05 v1(836.61,5189.05) C47.2@859.58,5212.01 ; v1(1486.22,5426.58) v1@1489.17,5429.53 ; C62.2@1708.66,5384.45 1711.42,5387.21 v1(1751.97,5387.21) ; C116.2@1751.97,574.02 1776.57,574.02 v1(1796.26,593.71) ; v1(1824.41,593.71) 1844.1,574.02 C115.2@1870.08,574.02 ; R23.2@2742.13,5544.69 2775.59,5544.69 v1(2785.43,5554.53) ; v1(3248.03,5318.31) C148.2@3287.4,5318.31 C147.2@3336.61,5318.31 3397.64,5318.31 C146.2@3415.35,5300.6 ; 3366.14,5652.96 C133.2@3415.35,5652.96 ; v1(3366.14,5702.17) 3366.14,5741.54 3395.67,5771.07 3395.67,5778.94 C99.2@3397.64,5780.91 ; 3375.98,5603.75 C145.2@3415.35,5603.75 ; 3375.98,5702.17 C119.2@3415.35,5702.17
  Bottom Layer w18: v1(68.9,5593.9) 138.98,5593.9 C69.2@141.73,5591.15 ; C71.2@141.73,5307.68 C59.2@230.31,5307.68 ; C57.2@232.28,5396.27 203.94,5396.27 v1@197.83,5390.16 ; C50.2@232.28,5581.3 270.47,5581.3 274.41,5585.24 v1(275.59,5584.06) ; C55.2@232.28,5707.29 270.87,5707.29 v1(275.59,5712.01) ; v1(397.36,5271.07) 405.24,5278.94 C73.2@433.07,5278.94 ; v1@476.38,5373.43 476.38,5436.42 480.31,5432.49 v1(480.31,5372.25) ; v1(667.32,5613.59) 667.32,5595.87 685.83,5577.37 C72.2@704.72,5577.37 ; v1(704.72,5259.26) 705.91,5260.44 R49.1@753.94,5260.44 ; v1@746.06,5487.6 751.96,5481.71 C56.2@751.96,5457.29 ; v1(767.72,5712.01) 772.43,5707.3 C53.2@803.15,5707.3 ; C51.2@803.15,5380.52 839.76,5380.52 v1(846.46,5387.21) ; C52.2@803.15,5577.37 833.86,5577.37 v1@842.52,5586.03 ; v1(1047.24,5227.76) C60.2@1047.24,5307.68 ; C58.2@1047.24,5591.15 1050,5593.9 v1(1102.36,5593.9) ; v1(1102.36,5389.18) C68.2@1126.77,5389.18 ; v1(1102.36,5706.1) 1132.67,5706.1 C66.2@1133.86,5707.29 ; C70.2@1133.86,5284.85 1147,5284.85 1172.59,5259.26 v1(1181.1,5259.26) ; v1(1240.16,5345.87) C74.2@1240.16,5389.19 ; 1486.22,5298.63 v1(1486.22,5328.16) v1(1486.22,5426.58) ; v1(1614.17,5259.26) 1615.35,5260.44 R48.1@1655.51,5260.44 ; v1(1614.17,5456.11) 1615.35,5457.29 C67.2@1651.57,5457.29 ; v1(1663.39,5712.01) 1668.1,5707.3 C64.2@1708.66,5707.3 ; C63.2@1708.66,5577.37 1735.43,5577.37 v1(1751.97,5593.9) ; C105.2@1751.97,711.82 1776.57,711.82 1786.42,701.97 v1@1796.26,692.13 ; v1(1751.97,5552.56) 1780.31,5552.56 C54.2@1818.9,5591.15 ; C65.2@1818.9,5307.68 1818.9,5280.91 1832.68,5267.13 v1(1879.92,5267.13) ; v1@1825.79,692.13 1845.47,711.82 C106.2@1870.08,711.82 ; v1(1938.98,5633.27) 1958.66,5613.59 C25.2@1994.09,5613.59 ; v1(1938.98,5672.64) C23.2@1994.09,5672.64 ; v1(1938.98,5731.7) C21.2@1994.09,5731.7 ; v1(2185.04,5259.26) C29.2@2226.38,5259.26 ; v1(2263.78,357.49) C114.2@2263.78,404.73 ; C104.2@2263.78,851.58 v1(2263.78,898.82) ; C26.2@2307.09,5554.53 v1(2352.36,5554.53) ; C24.2@2307.09,5613.59 v1(2352.36,5613.59) ; C22.2@2307.09,5672.64 2348.43,5672.64 v1(2352.36,5676.58) ; C20.2@2307.09,5731.7 2340.55,5731.7 v1(2352.36,5719.89) ; v1(2381.89,337.8) C113.2@2381.89,398.82 ; C103.2@2381.89,857.49 v1(2381.89,918.51) ; v1(2509.84,318.12) 2509.84,341.74 2549.21,381.11 2588.58,341.74 v1(2588.58,318.12) ; v1(2509.84,938.19) 2509.84,914.57 C102.2@2549.21,875.2 2588.58,914.57 v1(2588.58,938.19) ; C31.2@2562.99,5525.01 2616.14,5525.01 v1(2618.11,5526.97) ; R22.2@2564.96,5672.64 2610.24,5672.64 v1(2618.11,5664.77) ; C28.2@2740.16,5731.7 v1(2785.43,5731.7) ; v1(2765.75,5278.94) 2769.68,5282.88 C32.2@2816.19,5282.88 ; v1(2854.33,5692.33) C77.2@2938.98,5692.33 ; C76.2@2972.44,5290.75 3003.94,5290.75 v1(3011.81,5298.63) ; v1(3425.2,633.08) 3444.88,633.08 ; C4.2@3444.88,581.9 3444.88,633.08 ; C3.2@3444.88,684.26 3444.88,633.08 ; 3524.41,562.21 v1(3572.83,562.21) ; 3526.77,703.94 v1(3572.83,703.94) ; v1(3779.53,5652.96) C82.2@3840.55,5652.96 ; v1(3809.06,5564.38) 3811.02,5566.34 C83.2@3854.33,5566.34 ; v1(4001.97,5780.91) 4003.94,5778.94 C84.2@4003.94,5737.6 ; v1(4003.94,5538.79) C85.2@4003.94,5580.12 ; v1@197.83,5390.16 198.82,5389.18 v1(196.85,5389.18) v1@197.83,5390.16 ; v1(1102.36,5593.9) 1121.26,5593.9 C61.2@1133.86,5581.3 1114.96,5581.3 v1(1102.36,5593.9)
  other v1: 3572.83,514.97 3618.77,514.97 3664.7,514.97 3710.63,514.97 3756.56,514.97 3802.49,514.97 3848.42,514.97 3618.77,562.21 3664.7,562.21 3710.63,562.21 3756.56,562.21 3802.49,562.21 3848.42,562.21 3572.83,609.45 3618.77,609.45 3664.7,609.45 3710.63,609.45 3756.56,609.45 3802.49,609.45 3848.42,609.45 3572.83,656.7 3618.77,656.7 3664.7,656.7 3710.63,656.7 3756.56,656.7 3802.49,656.7 3848.42,656.7 1825.79,688.19 3618.77,703.94 3664.7,703.94 3710.63,703.94 3756.56,703.94 3802.49,703.94 3848.42,703.94 3572.83,751.19 3618.77,751.19 3664.7,751.19 3710.63,751.19 3756.56,751.19 3802.49,751.19 3848.42,751.19 1062.99,1405.56 1141.73,1405.56 1220.47,1405.56 1299.21,1405.56 1377.95,1405.56 482.28,1602.56 1417.32,1602.56 1974.21,1873.43 2121.86,1873.43 1019.49,1925.01 3082.06,1925.01 3082.06,2070.28 1015.35,2075.01 3421.06,2217.51 675,2217.92 822.64,2217.92 3273.43,2218.68 194.34,2286.82 240.27,2286.82 286.2,2286.82 332.14,2286.82 378.07,2286.82 424,2286.82 469.93,2286.82 3651.57,2306.5 3697.51,2306.5 3743.44,2306.5 3789.37,2306.5 3835.3,2306.5 3881.23,2306.5 3927.16,2306.5 1218.01,2326.19 194.34,2334.06 240.27,2334.06 286.2,2334.06 332.14,2334.06 378.07,2334.06 424,2334.06 469.93,2334.06 3651.57,2353.75 3697.51,2353.75 3743.44,2353.75 3789.37,2353.75 3835.3,2353.75 3881.23,2353.75 3927.16,2353.75 194.34,2381.3 240.27,2381.3 286.2,2381.3 332.14,2381.3 378.07,2381.3 424,2381.3 469.93,2381.3 3651.57,2400.99 3697.51,2400.99 3743.44,2400.99 3789.37,2400.99 3835.3,2400.99 3881.23,2400.99 3927.16,2400.99 194.34,2428.55 240.27,2428.55 286.2,2428.55 332.14,2428.55 378.07,2428.55 424,2428.55 469.93,2428.55 3651.57,2448.23 3697.51,2448.23 3743.44,2448.23 3789.37,2448.23 3835.3,2448.23 3881.23,2448.23 3927.16,2448.23 194.34,2475.79 240.27,2475.79 286.2,2475.79 332.14,2475.79 378.07,2475.79 424,2475.79 469.93,2475.79 3651.57,2495.48 3697.51,2495.48 3743.44,2495.48 3789.37,2495.48 3835.3,2495.48 3881.23,2495.48 3927.16,2495.48 194.34,2523.04 240.27,2523.04 286.2,2523.04 332.14,2523.04 378.07,2523.04 424,2523.04 469.93,2523.04 3651.57,2542.72 3697.51,2542.72 3743.44,2542.72 3789.37,2542.72 3835.3,2542.72 3881.23,2542.72 3927.16,2542.72 871.85,3250.01 635.63,3251.38 1496.08,3369.48 1574.8,3448.23 187.01,3989.57 232.94,3989.57 278.87,3989.57 324.8,3989.57 370.73,3989.57 416.67,3989.57 462.6,3989.57 3651.57,3989.57 3697.51,3989.57 3743.44,3989.57 3789.37,3989.57 3835.3,3989.57 3881.23,3989.57 3927.16,3989.57 187.01,4036.82 232.94,4036.82 278.87,4036.82 324.8,4036.82 370.73,4036.82 416.67,4036.82 462.6,4036.82 3651.57,4036.82 3697.51,4036.82 3743.44,4036.82 3789.37,4036.82 3835.3,4036.82 3881.23,4036.82 3927.16,4036.82 187.01,4084.06 232.94,4084.06 278.87,4084.06 324.8,4084.06 370.73,4084.06 416.67,4084.06 462.6,4084.06 3651.57,4084.06 3697.51,4084.06 3743.44,4084.06 3789.37,4084.06 3835.3,4084.06 3881.23,4084.06 3927.16,4084.06 187.01,4131.31 232.94,4131.31 278.87,4131.31 324.8,4131.31 370.73,4131.31 416.67,4131.31 462.6,4131.31 3651.57,4131.3 3697.51,4131.3 3743.44,4131.3 3789.37,4131.3 3835.3,4131.3 3881.23,4131.3 3927.16,4131.3 187.01,4178.55 232.94,4178.55 278.87,4178.55 324.8,4178.55 370.73,4178.55 416.67,4178.55 462.6,4178.55 3651.57,4178.55 3697.51,4178.55 3743.44,4178.55 3789.37,4178.55 3835.3,4178.55 3881.23,4178.55 3927.16,4178.55 187.01,4225.79 232.94,4225.79 278.87,4225.79 324.8,4225.79 370.73,4225.79 416.67,4225.79 462.6,4225.79 3651.57,4225.79 3697.51,4225.79 3743.44,4225.79 3789.37,4225.79 3835.3,4225.79 3881.23,4225.79 3927.16,4225.79 3273.43,4275.01 3420.87,4275.01 826.77,4282.51 675,4284.85 1015.35,4350.01 3078.37,4350.12 3078.37,4500.01 1015.35,4501.38 2574.61,4560.44 2820.87,4560.44 1974.21,4580.12 2121.86,4580.12 1470.87,4589.97 3823.82,5239.57 3927.17,5239.57 974.41,5274.02 3804.13,5274.02 3951.77,5274.02 846.46,5298.63 1909.45,5333.08 3804.13,5347.84 3951.77,5347.84 314.96,5377.37 1751.97,5475.79 2618.11,5485.64 748.03,5487.6 3804.13,5490.56 3951.77,5490.56 314.96,5515.16 1210.63,5515.16 846.46,5586.03 442.91,5672.64 511.81,5672.64 2618.11,5712.01 1377.95,5756.3
HSWAPEN: R54.1 U1.H9 | length 994.5
  Top Layer w5: R54.1@2047.24,2271.07 2047.24,2306.5 2062.01,2321.27 2101.38,2321.27 2125.98,2345.87 2125.98,2700.2 2145.67,2719.89 2330.74,2719.89 2342.52,2731.66 2342.52,2956.09 v1(2362.21,2975.78)
  Bottom Layer w6: U1.H9@2342.52,2995.48 v1(2362.21,2975.78)
INIT2: R59.1 U40.4 | length 104.1
  Top Layer w10: v3(1938.98,5515.16) 1968.5,5515.16 1972.44,5511.23 U40.4@1972.44,5491.54
  Bottom Layer w10: v3(1938.98,5515.16) 1948.82,5505.32 R59.1@1984.25,5505.32
INIT_B: INIT.1 R43.2 U1.AJ6 U2.11 U3.11 U40.2 | length 8259
  Top Layer w8: U3.11@137.8,5516.34 261.02,5516.34 v1(275.59,5530.91) ; U2.11@1043.31,5516.34 1166.54,5516.34 v1(1181.1,5530.91)
  Top Layer w10: v1(1968.5,5465.95) U40.2@2062.99,5465.95
  Mid-Layer 5 w5: v1(275.59,5530.91) 386.01,5641.33 756.11,5641.33 828.57,5713.8 992.31,5713.8 1082.68,5623.43 1141.73,5623.43 1157.48,5607.68 1157.48,5554.53 v1(1181.1,5530.91) 1220.47,5570.28 1220.47,5771.07 1269.68,5820.28 1417.32,5820.28 1456.69,5780.91 v2(1496.06,5780.91) ; v2@1496.06,5790.75 v2(1496.06,5780.91) ; v1(1968.5,5465.95) 1968.5,5298.63 1998.03,5269.1 2114.17,5269.1 2125.3,5280.23 2125.3,5434.45 2114.17,5445.58 2089.46,5445.58 2075,5460.05 2075,5750.6 2005.32,5820.28 1574.8,5820.28 1535.43,5780.91 v2(1496.06,5780.91)
  Mid-Layer 7 w5: v1(275.59,5530.91) 84.65,5530.91 49.03,5495.3 49.03,2710.22 118.11,2641.15 482.28,2641.15 641.14,2800.01 923.75,2800.01 925,2798.75
  Mid-Layer 7 w5.12: 925,2798.75 1437.13,2798.75 v1(1496.06,2857.68)
  Bottom Layer w6: v1@1496.08,2857.68 U1.AJ6@1515.75,2877.37
  Bottom Layer w8: R43.2@1440.94,5708.08 1440.94,5765.16 1456.69,5780.91 v2(1496.06,5780.91)
INIT_LED: D41.A R59.2 | length 187.2
  Top Layer w10: D41.A@2057.09,5584.06 2099.44,5584.06 2116.14,5567.36 v3(2116.14,5515.15)
  Bottom Layer w10: R59.2@2051.18,5505.32 2096.46,5505.32 2106.29,5515.15 v3(2116.14,5515.15)
led1: U1.AA29 XP2.A25 | length 927.2
  Mid-Layer 7 w5: v1(1811.02,3802.56) 1830.52,3822.06 1830.52,4134.05 1951.79,4255.32 2224.41,4255.32 2275,4305.91 XP2.A25@2275,4350.01
  Bottom Layer w6: v1(1811.02,3802.56) U1.AA29@1830.71,3782.88
led2: U1.U28 XP2.A26 | length 905.3
  Mid-Layer 7 w5: v1(1968.52,3763.19) 1949,3782.71 1949,4098.03 2012.8,4161.82 2229.33,4161.82 2325,4257.49 XP2.A26@2325,4350.01
  Bottom Layer w6: v1(1968.52,3763.19) U1.U28@1988.19,3743.51
led3: U1.U29 XP2.A27 | length 886.5
  Mid-Layer 7 w5: v1(1968.5,3802.56) 1988.37,3822.43 1988.37,3904.15 2002.95,3918.72 2002.95,4083.08 2047.24,4127.37 2281.51,4127.37 2381.7,4227.56 2381.7,4294.88 2375,4301.58 XP2.A27@2375,4350.01
  Bottom Layer w6: v1(1968.5,3802.56) U1.U29@1988.19,3782.88
led4: U1.R29 XP2.A28 | length 803.7
  Bottom Layer w5: U1.R29@2066.93,3782.88 2086.61,3802.56 2086.61,3846.86 2140.75,3900.99 2173.25,3900.99 2185.04,3912.78 2185.04,4088 2214.57,4117.53 2332.68,4117.53 2425,4209.85 XP2.A28@2425,4350.01
led5: U1.AA30 XP2.B25 | length 964.9
  Mid-Layer 7 w5: v1(1811.02,3841.93) 1791.52,3861.43 1791.52,4166.92 1924.21,4299.61 2215.55,4299.61 2250,4334.06 2250,4375.01 XP2.B25@2275,4400.01
  Bottom Layer w6: v1(1811.02,3841.93) U1.AA30@1830.71,3822.25
led6: U1.U30 XP2.B26 | length 934.8
  Bottom Layer w5: U1.U30@1988.19,3822.25 1899.61,3910.83 1899.61,4151.97 2017.72,4270.08 2263.78,4270.08 2300,4306.3 2300,4375.01 XP2.B26@2325,4400.01
led7: U1.N27 XP2.B27 | length 807
  Mid-Layer 4 w5: v1(2165.36,3723.82) 2185.18,3743.63 2212.74,3743.63 2224.53,3755.42 2224.53,3901.05 2234.31,3910.83 2234.31,4156.95 2350,4272.64 2350,4375.01 XP2.B27@2375,4400.01
  Bottom Layer w6: U1.N27@2145.68,3704.13 v1(2165.36,3723.82)
led8: U1.T27 XP2.B28 | length 1015.2
  Mid-Layer 1 w5: v1(2007.88,3723.82) 2057.09,3773.03 2057.09,3955.12 2066.93,3964.96 2066.93,4147.05 2135.83,4215.95 2372.05,4215.95 2400,4243.9 2400,4375.01 XP2.B28@2425,4400.01
  Bottom Layer w6: v1(2007.88,3723.82) U1.T27@2027.56,3704.14
led9: U1.R28 XP2.B29 | length 975.4
  Mid-Layer 1 w5: v1(2086.62,3763.19) 2086.62,3940.37 2116.14,3969.89 2116.14,4137.21 2165.35,4186.42 2421.26,4186.42 2450,4215.16 2450,4375.01 XP2.B29@2475,4400.01
  Bottom Layer w6: U1.R28@2066.93,3743.51 v1(2086.62,3763.19)
led10: U1.G25 XP2.B30 | length 938
  Mid-Layer 2 w5: v1(2401.58,3645.07) 2382.08,3625.57 2354.13,3625.57 2342.7,3637 2342.7,3852.15 2421.07,3930.52 2421.07,4166.74 2500.5,4246.16 2500.5,4375.51 XP2.B30@2525,4400.01
  Bottom Layer w6: U1.G25@2381.89,3625.4 v1(2401.58,3645.07)
led11: U1.Y30 XP2.C25 | length 968
  Mid-Layer 7 w5: v1(1850.39,3841.93) 1894.68,3886.23 1894.68,4107.68 1973.43,4186.42 2204.72,4186.42 2300,4281.7 2300,4425.01 XP2.C25@2275,4450.01
  Bottom Layer w6: v1(1850.39,3841.93) U1.Y30@1870.08,3822.25
led12: U1.U27 XP2.C26 | length 1017
  Mid-Layer 1 w5: v1(1968.51,3723.82) 1988.19,3743.5 1988.19,4030.89 1997.85,4040.55 1997.85,4186.24 2091.54,4279.93 2288.39,4279.93 2300,4291.54 2300,4425.01 XP2.C26@2325,4450.01
  Bottom Layer w6: v1(1968.51,3723.82) U1.U27@1988.19,3704.14
led13: U1.T28 XP2.C27 | length 987.8
  Mid-Layer 1 w5: v1(2007.88,3763.19) 2027.49,3782.79 2027.49,4166.67 2116.14,4255.32 2322.83,4255.32 2350,4282.49 2350,4425.01 XP2.C27@2375,4450.01
  Bottom Layer w6: v1(2007.88,3763.19) U1.T28@2027.56,3743.51
led14: U1.P30 XP2.C28 | length 886
  Bottom Layer w5: 2204.72,3871.46 2244.09,3910.83 2244.09,4051.6 2275.39,4082.89 2406.31,4082.89 2450,4126.58 2450,4425.01 XP2.C28@2425,4450.01
  Bottom Layer w6: U1.P30@2106.3,3822.25 2155.51,3871.46 2204.72,3871.46
led15: U1.P28 XP2.C29 | length 1052.4
  Mid-Layer 1 w5: v1(2125.99,3763.19) 2145.83,3783.03 2145.83,3861.78 2195.07,3911.02 2195.07,4078.34 2253.75,4137.03 2464.73,4137.03 2472.24,4129.52 2488.39,4129.52 2529.53,4170.66 2529.53,4294.69 2500,4324.22 2500,4425.01 XP2.C29@2475,4450.01
  Bottom Layer w6: U1.P28@2106.3,3743.51 v1(2125.99,3763.19)
led16: U1.P27 XP2.D25 | length 865.7
  Mid-Layer 4 w5: v1(2125.99,3723.82) 2145.49,3743.31 2145.49,4215.77 2250,4320.28 2250,4475.01 XP2.D25@2275,4500.01
  Bottom Layer w6: U1.P27@2106.3,3704.14 v1(2125.99,3723.82)
led17: U1.N28 XP2.D26 | length 830.8
  Mid-Layer 4 w5: v1(2165.35,3763.19) 2185.04,3782.88 2185.04,4183.45 2300,4298.41 2300,4475.01 XP2.D26@2325,4500.01
  Bottom Layer w6: U1.N28@2145.68,3743.52 v1(2165.35,3763.19)
led18: U1.T30 XP2.D27 | length 1029.8
  Bottom Layer w5: U1.T30@2027.56,3822.25 1953.74,3896.07 1953.74,4117.53 2047.24,4211.03 2298.23,4211.03 2350,4262.8 2350,4475.01 XP2.D27@2375,4500.01
led19: U1.R30 XP2.D28 | length 899.9
  Bottom Layer w5: U1.R30@2066.93,3822.25 2066.93,3860.64 2145.85,3939.56 2145.85,4117.71 2191.03,4162.89 2317.03,4162.89 2400,4245.85 2400,4475.01 XP2.D28@2425,4500.01
led20: U1.N30 XP2.D29 | length 1012.3
  Mid-Layer 7 w5: v1(2165.35,3841.93) 2145.85,3861.43 2145.85,3999.6 2165.35,4019.1 2440.94,4019.1 2499.82,4077.97 2499.82,4475.19 XP2.D29@2475,4500.01
  Bottom Layer w6: U1.N30@2145.67,3822.25 v1(2165.35,3841.93)
M0: R50.1 U1.AK26 | length 551.2
  Top Layer w5: v1(1456.69,3684.45) 1476.38,3664.77 1594.49,3664.77 1594.49,3871.46 1604.33,3881.3 1679.13,3881.3 1685.04,3887.21 R50.1@1685.04,3960.05
  Bottom Layer w6: v1@1455.36,3683.12 1458.03,3683.12 U1.AK26@1476.38,3664.77
M1: R51.1 U1.AG24 | length 528
  Top Layer w5: v1(1574.81,3605.7) 1593.68,3624.57 1633.45,3624.57 1633.45,3842.34 1643.7,3852.59 1733.1,3852.59 1744.09,3863.59 R51.1@1744.09,3960.05
  Bottom Layer w6: v1(1574.81,3605.7) U1.AG24@1594.49,3586.02
MC_SN: DSN.1 R55.2 U1.K21 U11.2 | length 2941.7
  Top Layer w18: U11.2@2850.39,5418.71 2931.1,5418.71 2933.07,5416.74 v1(2933.07,5347.84)
  Mid-Layer 7 w5: v1(2283.48,3487.6) 2303.16,3507.28 2303.16,3783.05 2302.99,3782.88 2263.78,3782.88 2263.78,3950.2 2283.46,3969.89 2672.24,3969.89 3016.73,4314.38 3095.47,4314.38 3121,4339.9 3121,4835.11 2883.86,5072.25 2883.86,5328.16 2903.54,5347.84 v1(2933.07,5347.84)
  Bottom Layer w6: U1.K21@2263.78,3467.92 v1(2283.48,3487.6)
  Bottom Layer w18: R55.2@2885.83,5298.63 2885.83,5333.51 2900.85,5348.53 2932.38,5348.53 v1(2933.07,5347.84)